# Altium PCB UU-PCBA-MANT-CON-AB.PcbDoc
Units mm, origin at the board's own origin, x right, y up, seen from the top; angles counter-clockwise.
Board outline 64 x 61 mm, 2 copper layers (Top Layer, Bottom Layer), stack 3.118 mm thick; 2 components, 3 nets, 13 pads, 0 vias.
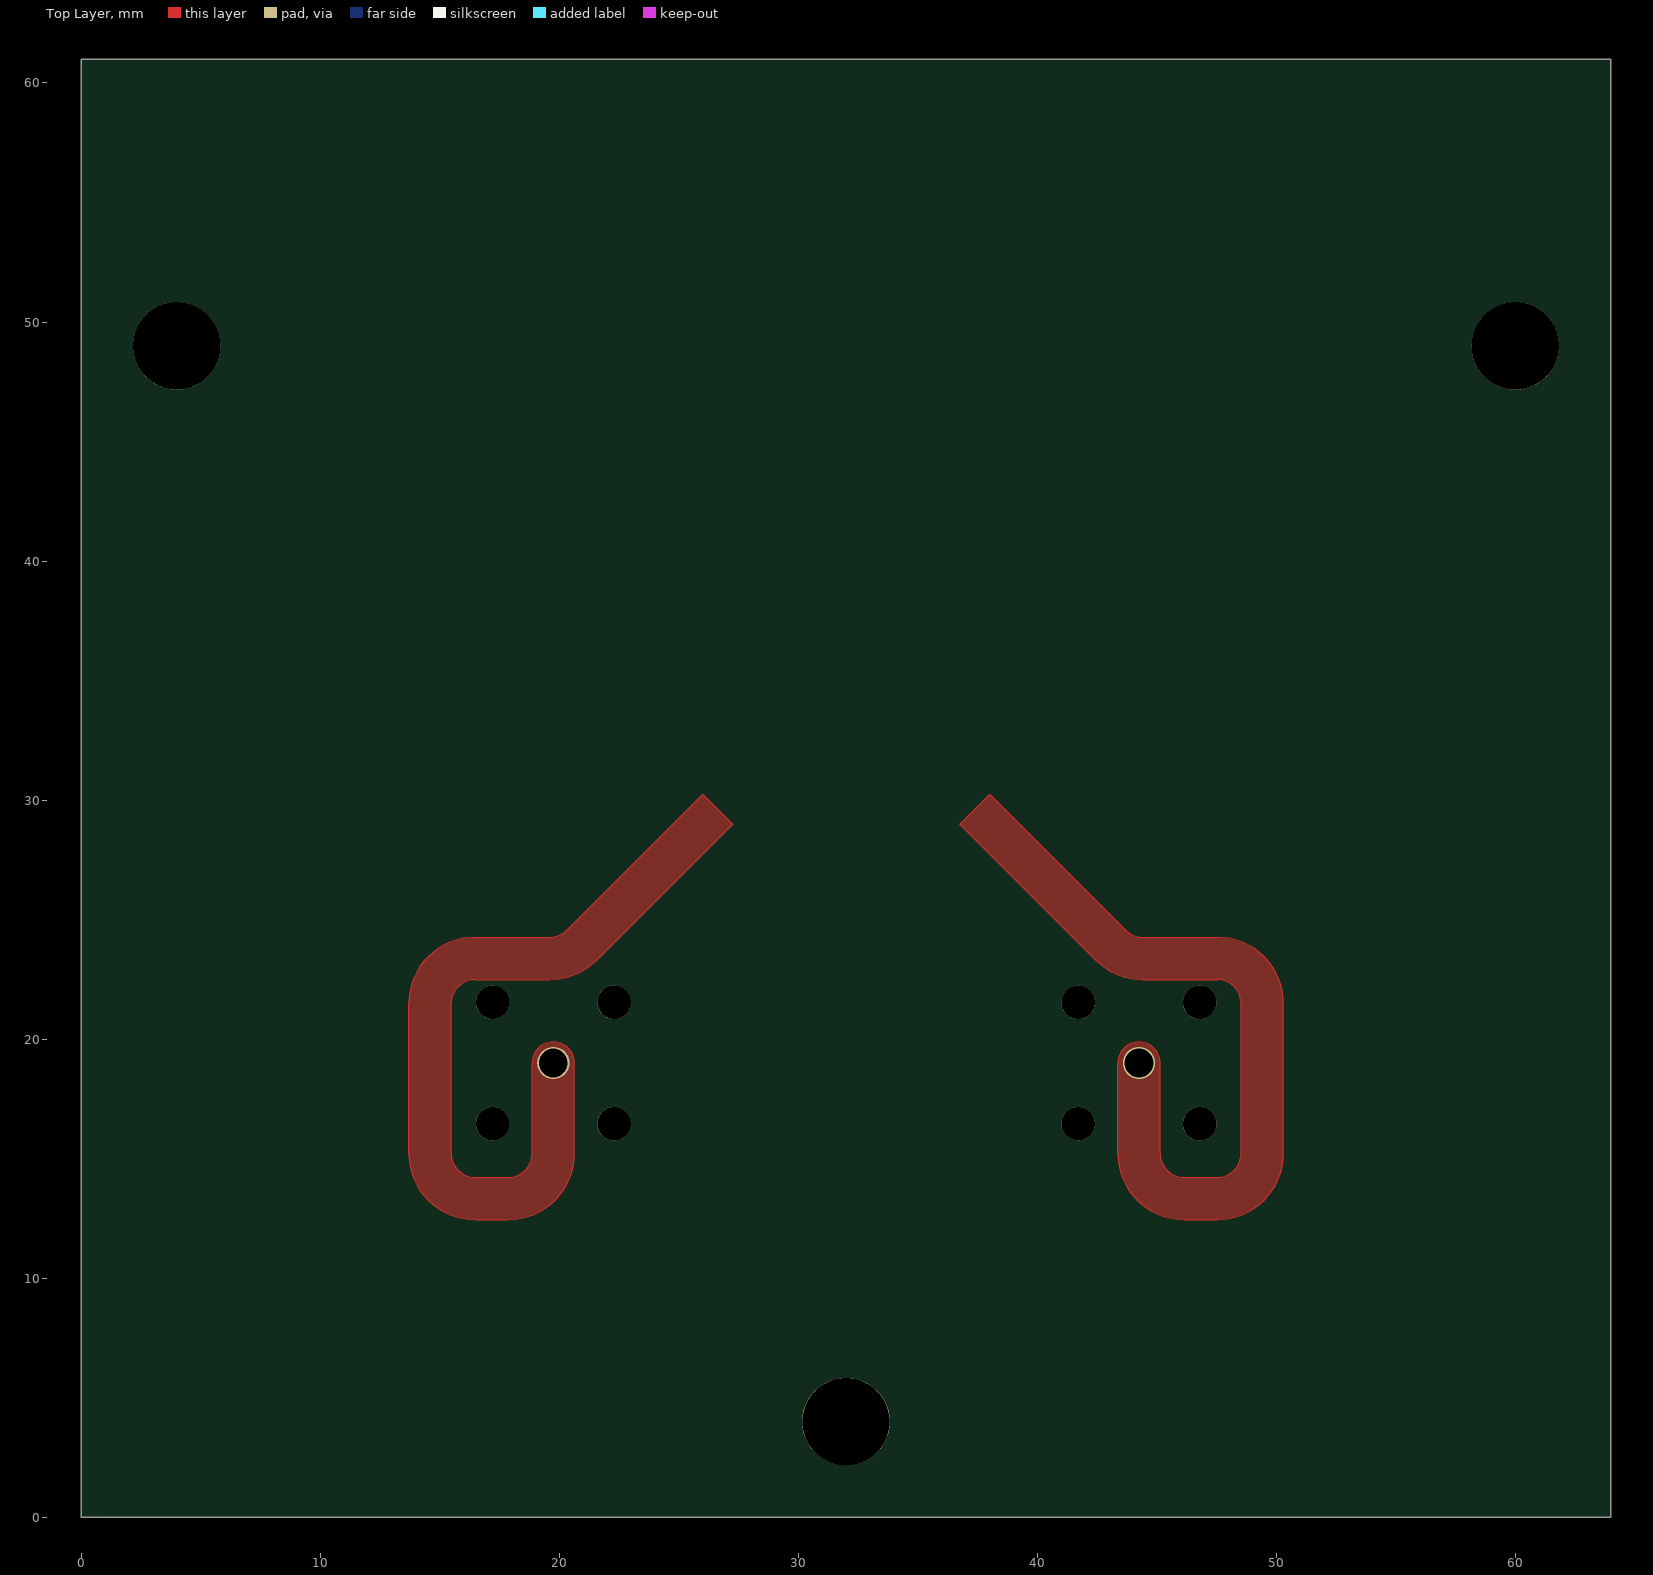
[diagram p0: Top Layer view]
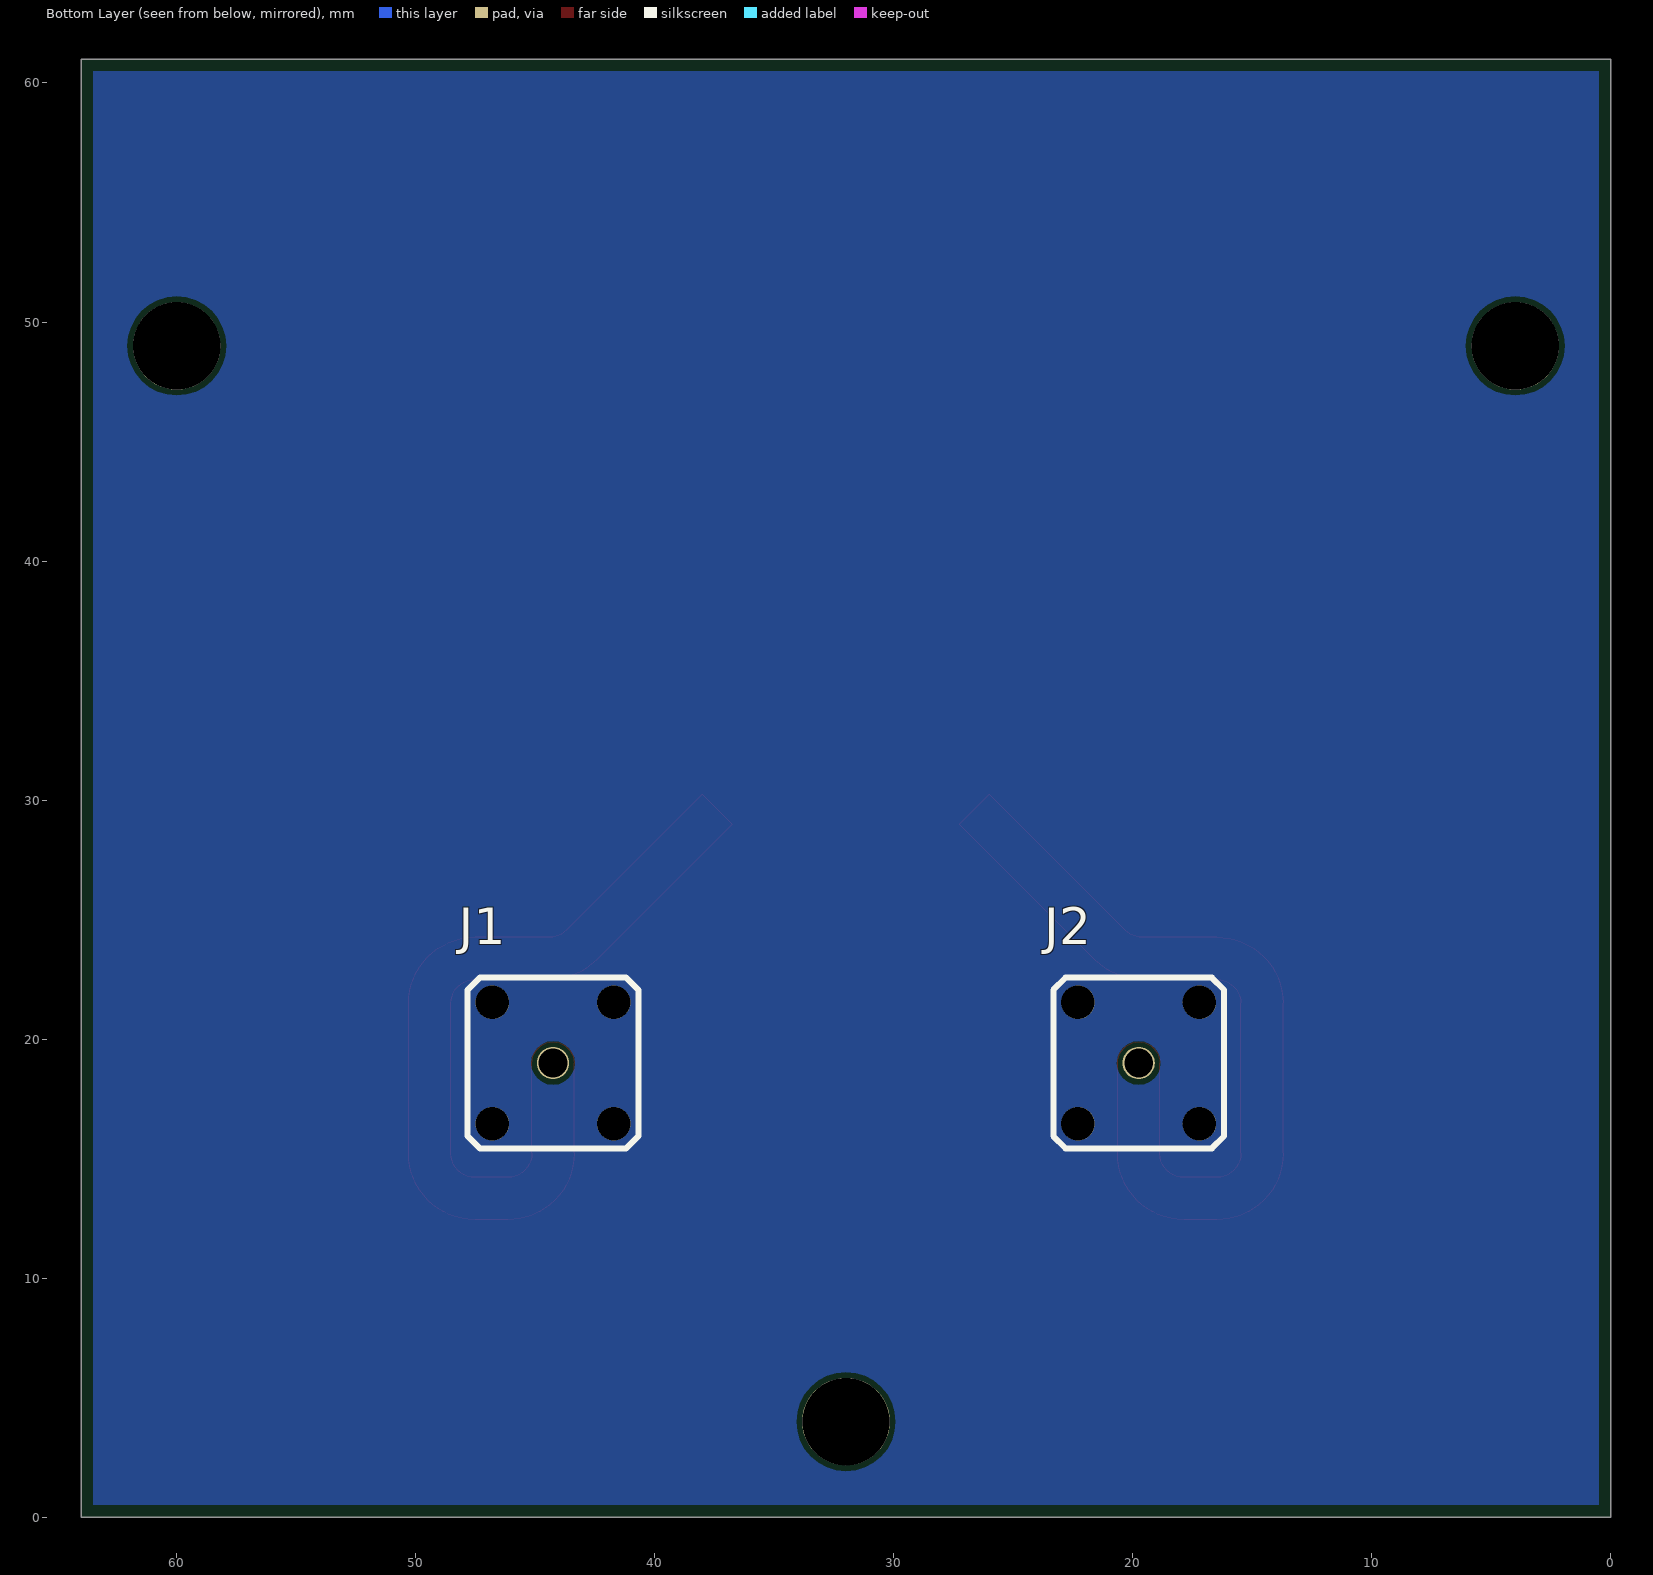
[diagram p1: Bottom Layer view, seen from below]

## Layer stack, top to bottom
Top Solder: solder mask 0.0254, Solder Resist, Dk 4
Top Layer: signal copper 0.035
Dielectric 1: core 3.048, Rogers AD300D, Dk 3
Bottom Layer: signal copper 0.035
Bottom Solder: solder mask 0.0254, Solder Resist, Dk 4

## Board outline
0,0 64,0 64,61 0,61

## Design rules (kind name [scope] priority, off if disabled: settings)
BoardOutlineClearance [All] p1: gap=0.508 ignorepadtopadclearanceinfootprint=FALSE
Clearance [All] p1: gap=0.254 ignorepadtopadclearanceinfootprint=FALSE except(0: Arc-Hole Track-Hole SMDPad-Hole THPad-Hole Via-Hole Fill-Hole Poly-Hole Region-Hole Text-Hole; 0.229: Track-THPad Track-Poly THPad-Poly)
ComponentClearance [All] p1: gap=0 collisioncheckmode=3 verticalgap=0 showdistances=FALSE
HoleSize [All] p1: absolutevalues=TRUE maxlimit=4 minlimit=0.025 maxpercent=80.000 minpercent=20.000
PlaneConnect [All] p1: planeconnectstyle=Direct reliefexpansion=0.508 reliefentries=4 reliefconductorwidth=0.254 reliefairgap=0.254
PolygonConnect [All] p1: connectstyle=Direct reliefconductorwidth=0.4 reliefentries=4 polygonreliefangle="45 Angle" airgapwidth=0.3
RoutingVias [All] p1: holewidth=0.711 width=1.27 viastyle="Through Hole" minholewidth=0.711 minwidth=1.27 maxholewidth=0.711 maxwidth=1.27
SolderMaskExpansion [All] p1: expansion=0.102 istentingtop=FALSE
Width [All] p1: maxlimit=30 minlimit=0.01 preferedwidth=1.1 minimp=50.000000 maximp=50.000000 favimp=50.000000
27 further rules are at their usual default settings.

## Components (designator, comment, footprint, x,y, rotation, side; value= is the part's Value field where it differs from the comment)
J1 "MCX Male" RSP-199156-01 44.256,19 r180 bottom
J2 "MCX Male" RSP-199156-01 19.756,19 r180 bottom

## Footprints (in the part's own frame and the unit in brackets; to place one, negate y for a bottom-side part, rotate by r counter-clockwise, add the part's x,y. Pads: shape width x height; smd on the part's side, far side on the other; paste and mask are expansions set on the pad)
RSP-199156-01 [mm] "Samtec MODIFIED 50 OHM MCX JACK PLUG, THROUGH-HOLE"
  round 1.4 hole 1.4 paste+0 mask-5: 0(-2.54,-2.54) 0(2.54,-2.54)
  round 1.4 hole 1.4 unplated paste+0 mask-5: 0(-2.54,2.54) 0(2.54,2.54)
  round 1.35 hole 1.2 paste+0 mask-5: 1(0,0)
  silkscreen extent -3.57,-3.57 3.57,3.57, body extent -3,-3 3,3, height 8.42

## Part data
J1 J2: library part RSP-199156-01, "Samtec MODIFIED 50 OHM MCX JACK PLUG, THROUGH-HOLE"

## Free pads (board coordinates)
  round 3.66 hole 3.66 unplated: 0(4,49) 0(32,4) 0(60,49)

## Nets (pads, with @x,y where several pads share a name; then routed paths per layer and width w, separated by ;. In a path a pad name is that pad's centre, name@x,y a point inside that pad or via, vN(x,y) a via of type N, cw(c..) or ccw(c..) an arc to the next point about the centre after c; other vN are vias at no path point)
ANT1: J1.1 | length 81.6
  Top Layer w0.013: J1.1@44.856,18.999 ccw(c44.256,18.999) J1.1@44.856,18.999 ; J1.1@44.856,18.999 ccw(c44.256,18.999) J1.1@44.856,18.999 ; 36.755,28.999 38.006,30.251 43.7,24.557 ccw(c44.407,25.264) 44.025,24.34 ccw(c44.407,25.264) 44.407,24.264 47.531,24.264 cw(c47.531,21.494) 49.49,23.453 cw(c47.531,21.494) 50.301,21.494 50.301,15.219 cw(c47.531,15.219) 49.49,13.26 cw(c47.531,15.219) 47.531,12.449 46.141,12.449 cw(c46.141,15.219) 44.183,13.26 cw(c46.141,15.219) 43.371,15.219 43.371,18.999 cw(c44.256,18.999) 44.256,19.884 cw(c44.256,18.999) 45.141,18.999 45.141,15.219 ccw(c46.141,15.219) 45.434,14.512 ccw(c46.141,15.219) 46.141,14.219 47.531,14.219 ccw(c47.531,15.219) 48.238,14.512 ccw(c47.531,15.219) 48.531,15.219 48.531,21.494 ccw(c47.531,21.494) 48.238,22.201 ccw(c47.531,21.494) 47.531,22.494 44.407,22.494 cw(c44.407,25.264) 43.347,22.705 cw(c44.407,25.264) 42.449,23.305 36.755,28.999 ; J1.1@44.822,18.999 ccw(c44.256,18.999) J1.1@44.822,18.999
ANT2: J2.1 | length 81.6
  Top Layer w0.013: J2.1@20.356,18.999 ccw(c19.756,18.999) J2.1@20.356,18.999 ; J2.1@20.356,18.999 ccw(c19.756,18.999) J2.1@20.356,18.999 ; 13.711,15.219 ccw(c16.481,15.219) 14.523,13.26 ccw(c16.481,15.219) 16.481,12.449 17.871,12.449 ccw(c17.871,15.219) 19.83,13.26 ccw(c17.871,15.219) 20.641,15.219 20.641,18.999 ccw(c19.756,18.999) 19.756,19.884 ccw(c19.756,18.999) 18.871,18.999 18.871,15.219 cw(c17.871,15.219) 18.578,14.512 cw(c17.871,15.219) 17.871,14.219 16.481,14.219 cw(c16.481,15.219) 15.774,14.512 cw(c16.481,15.219) 15.481,15.219 15.481,21.494 cw(c16.481,21.494) 15.774,22.201 cw(c16.481,21.494) 16.481,22.494 19.605,22.494 ccw(c19.605,25.264) 20.665,22.705 ccw(c19.605,25.264) 21.564,23.305 27.258,28.999 26.007,30.251 20.312,24.557 cw(c19.605,25.264) 19.988,24.34 cw(c19.605,25.264) 19.605,24.264 16.481,24.264 ccw(c16.481,21.494) 14.523,23.453 ccw(c16.481,21.494) 13.711,21.494 13.711,15.219 ; J2.1@20.322,18.999 ccw(c19.756,18.999) J2.1@20.322,18.999
GND: J1.0 J2.0

## Polygon pours and split planes (outlines as drawn)
GND on Bottom Layer "Bottom Layer-GND" (solid, pour order 0): 0,64 0,0 64,0 64,64
ANT1 on Top Layer "ANT1_L01_P022" (solid, pour order 22): 48.238,14.512 ccw(c47.531,15.219) 48.531,15.219 48.531,21.494 ccw(c47.531,21.494) 48.238,22.201 ccw(c47.531,21.494) 47.531,22.494 44.407,22.494 cw(c44.407,25.264) 43.347,22.705 cw(c44.407,25.264) 42.449,23.305 36.755,28.999 38.006,30.251 43.7,24.557 ccw(c44.407,25.264) 44.025,24.34 ccw(c44.407,25.264) 44.407,24.264 47.531,24.264 cw(c47.531,21.494) 49.49,23.453 cw(c47.531,21.494) 50.301,21.494 50.301,15.219 cw(c47.531,15.219) 49.49,13.26 cw(c47.531,15.219) 47.531,12.449 46.141,12.449 cw(c46.141,15.219) 44.183,13.26 cw(c46.141,15.219) 43.371,15.219 43.371,18.999 cw(c44.256,18.999) 44.256,19.884 cw(c44.256,18.999) 45.141,18.999 45.141,15.219 ccw(c46.141,15.219) 45.434,14.512 ccw(c46.141,15.219) 46.141,14.219 47.531,14.219 ccw(c47.531,15.219)
ANT2 on Top Layer "ANT2_L01_P021" (solid, pour order 21): 15.774,14.512 cw(c16.481,15.219) 15.481,15.219 15.481,21.494 cw(c16.481,21.494) 15.774,22.201 cw(c16.481,21.494) 16.481,22.494 19.605,22.494 ccw(c19.605,25.264) 20.665,22.705 ccw(c19.605,25.264) 21.564,23.305 27.258,28.999 26.007,30.251 20.312,24.557 cw(c19.605,25.264) 19.988,24.34 cw(c19.605,25.264) 19.605,24.264 16.481,24.264 ccw(c16.481,21.494) 14.523,23.453 ccw(c16.481,21.494) 13.711,21.494 13.711,15.219 ccw(c16.481,15.219) 14.523,13.26 ccw(c16.481,15.219) 16.481,12.449 17.871,12.449 ccw(c17.871,15.219) 19.83,13.26 ccw(c17.871,15.219) 20.641,15.219 20.641,18.999 ccw(c19.756,18.999) 19.756,19.884 ccw(c19.756,18.999) 18.871,18.999 18.871,15.219 cw(c17.871,15.219) 18.578,14.512 cw(c17.871,15.219) 17.871,14.219 16.481,14.219 cw(c16.481,15.219)
no net on Top Layer "Top Layer-No Net 4" (solid, pour order 12): 32,36
no net on Top Layer "Top Layer-No Net" (solid, pour order 6): 0,15.05
no net on Top Layer "Top Layer-No Net 1" (solid, pour order 4): 0,0
no net on Top Layer "Top Layer-No Net 2" (solid, pour order 2): 0,0
no net on Top Solder (solid): 0,61 64,61 64,0.006 63.994,0 0,0

## Silkscreen, mask and mechanical layers (free items; w line width, h text height)
Top Solder:
  circle w1: c44.253,19 r0.25
  circle w1: c19.759,19 r0.25
  rectangle: 0,0 64,0.693
  region: 0.699,0 0.699,61 0.006,61 0.006,0
  region: 63.997,0 63.997,61 63.304,61 63.304,0
  rectangle: 0,60.307 64,61
  pour cut-out: 45.896,16.46 ccw(c46.796,16.46) 46.796,15.56 ccw(c46.796,16.46) 47.696,16.46 ccw(c46.796,16.46) 46.796,17.36 ccw(c46.796,16.46)
  pour cut-out: 45.896,21.54 ccw(c46.796,21.54) 46.796,20.64 ccw(c46.796,21.54) 47.696,21.54 ccw(c46.796,21.54) 46.796,22.44 ccw(c46.796,21.54)
  pour cut-out: 16.316,21.54 ccw(c17.216,21.54) 17.216,20.64 ccw(c17.216,21.54) 18.116,21.54 ccw(c17.216,21.54) 17.216,22.44 ccw(c17.216,21.54)
  pour cut-out: 16.316,16.46 ccw(c17.216,16.46) 17.216,15.56 ccw(c17.216,16.46) 18.116,16.46 ccw(c17.216,16.46) 17.216,17.36 ccw(c17.216,16.46)
  pour cut-out: 40.816,21.54 ccw(c41.716,21.54) 41.716,20.64 ccw(c41.716,21.54) 42.616,21.54 ccw(c41.716,21.54) 41.716,22.44 ccw(c41.716,21.54)
  pour cut-out: 40.816,16.46 ccw(c41.716,16.46) 41.716,15.56 ccw(c41.716,16.46) 42.616,16.46 ccw(c41.716,16.46) 41.716,17.36 ccw(c41.716,16.46)
  pour cut-out: 21.396,21.54 ccw(c22.296,21.54) 22.296,20.64 ccw(c22.296,21.54) 23.196,21.54 ccw(c22.296,21.54) 22.296,22.44 ccw(c22.296,21.54)
  pour cut-out: 21.396,16.46 ccw(c22.296,16.46) 22.296,15.56 ccw(c22.296,16.46) 23.196,16.46 ccw(c22.296,16.46) 22.296,17.36 ccw(c22.296,16.46)
  pour cut-out: 46.053,19 cw(c44.253,19) 44.253,17.2 cw(c44.253,19) 42.453,19 cw(c44.253,19) 44.253,20.8 cw(c44.253,19)
  pour cut-out: 17.959,19 ccw(c19.759,19) 19.759,17.2 ccw(c19.759,19) 21.559,19 ccw(c19.759,19) 19.759,20.8 ccw(c19.759,19)
  pour cut-out: 19.726,19.001 ccw(c19.756,19.001) 19.756,18.971 ccw(c19.756,19.001) 19.786,19.001 ccw(c19.756,19.001) 19.756,19.031 ccw(c19.756,19.001)
  region: 0,61 64,61
Bottom Solder:
  circle w2.2: c17.216,21.54 r0.001
  circle w2.2: c22.296,21.54 r0.001
  circle w2.2: c46.796,21.54 r0.001
  circle w2.2: c41.716,21.54 r0.001
  circle w2.2: c46.795,16.46 r0.001
  circle w2.2: c41.715,16.46 r0.001
  circle w2.2: c17.215,16.46 r0.001
  circle w2.2: c22.295,16.46 r0.001
  circle w1.55: c44.256,18.999 r0.001
  circle w1.55: c19.756,19 r0.001
SIG-Outline:
  the board outline again, w0.127
old_patch:
  circle w0.013: c32,42.836 r15.4
  circle w0.013: c44.256,19.006 r0.45
  circle w0.013: c44.256,19.006 r0.485
  circle w0.013: c46.801,16.461 r0.665
  circle w0.013: c46.801,16.461 r0.7
  circle w0.013: c22.301,16.461 r0.665
  circle w0.013: c22.301,16.461 r0.7
  circle w0.013: c19.756,19.006 r0.45
  circle w0.013: c19.756,19.006 r0.485
  circle w0.013: c41.711,16.461 r0.665
  circle w0.013: c41.711,16.461 r0.7
  circle w0.013: c17.211,16.461 r0.665
  circle w0.013: c17.211,16.461 r0.7
  circle w0.013: c44.256,19.006 r0.485
  circle w0.013: c19.756,19.006 r0.485
  circle w0.013: c22.301,21.551 r0.7
  circle w0.013: c17.211,21.551 r0.7
  circle w0.013: c46.801,21.551 r0.7
  circle w0.013: c41.711,21.551 r0.7
  circle w0.013: c22.301,16.461 r0.7
  circle w0.013: c17.211,16.461 r0.7
  circle w0.013: c46.801,16.461 r0.7
  circle w0.013: c41.711,16.461 r0.7
  lines w0.013: 0.006,0.006 0.006,61 64.006,61 64.006,0.006 0.006,0.006 ; 17.495,41.234 ccw(c32.006,42.836) 18.739,36.741 ccw(c32.006,42.836) 21.337,32.87 21.995,33.484 cw(c32.006,42.836) 19.754,36.707 cw(c32.006,42.836) 18.519,40.434 19.208,40.557 ccw(c32.006,42.836) 22.814,33.644 ccw(c32.006,42.836) 29.727,30.038 29.604,29.349 cw(c32.006,42.836) 25.877,30.584 cw(c32.006,42.836) 22.654,32.825 22.04,32.167 ccw(c32.006,42.836) 25.911,29.569 ccw(c32.006,42.836) 30.404,28.325 30.679,30.809 cw(c32.006,42.836) 23.45,34.28 cw(c32.006,42.836) 19.979,41.509 17.495,41.234 ; 17.495,44.438 cw(c32.006,42.836) 18.739,48.931 cw(c32.006,42.836) 21.337,52.803 21.995,52.188 ccw(c32.006,42.836) 19.754,48.965 ccw(c32.006,42.836) 18.519,45.239 19.208,45.116 cw(c32.006,42.836) 22.814,52.029 cw(c32.006,42.836) 29.727,55.635 29.604,56.324 ccw(c32.006,42.836) 25.877,55.089 ccw(c32.006,42.836) 22.654,52.848 22.04,53.505 cw(c32.006,42.836) 25.911,56.103 cw(c32.006,42.836) 30.404,57.348 30.679,54.863 ccw(c32.006,42.836) 23.45,51.392 ccw(c32.006,42.836) 19.979,44.164 17.495,44.438 ; 33.334,30.809 ccw(c32.006,42.836) 40.562,34.28 ccw(c32.006,42.836) 44.033,41.509 46.518,41.234 cw(c32.006,42.836) 45.273,36.741 cw(c32.006,42.836) 42.675,32.87 42.018,33.484 ccw(c32.006,42.836) 44.259,36.707 ccw(c32.006,42.836) 45.494,40.434 44.805,40.557 cw(c32.006,42.836) 41.199,33.644 cw(c32.006,42.836) 34.286,30.038 34.409,29.349 ccw(c32.006,42.836) 38.135,30.584 ccw(c32.006,42.836) 41.358,32.825 41.973,32.167 cw(c32.006,42.836) 38.101,29.569 cw(c32.006,42.836) 33.608,28.325 33.334,30.809 ; 33.334,54.863 cw(c32.006,42.836) 40.562,51.392 cw(c32.006,42.836) 44.033,44.164 46.518,44.438 ccw(c32.006,42.836) 45.273,48.931 ccw(c32.006,42.836) 42.675,52.803 42.018,52.188 cw(c32.006,42.836) 44.259,48.965 cw(c32.006,42.836) 45.494,45.239 44.805,45.116 ccw(c32.006,42.836) 41.199,52.029 ccw(c32.006,42.836) 34.286,55.635 34.409,56.324 cw(c32.006,42.836) 38.135,55.089 cw(c32.006,42.836) 41.358,52.848 41.973,53.505 ccw(c32.006,42.836) 38.101,56.103 ccw(c32.006,42.836) 33.608,57.348 33.334,54.863
old_feed:
  circle w0.013: c19.756,19.006 r0.485
  circle w0.013: c44.256,19.006 r0.485
  circle w0.013: c44.256,19.006 r0.45
  circle w0.013: c19.756,19.006 r0.485
  circle w0.013: c19.756,19.006 r0.45
  circle w0.013: c46.801,16.461 r0.7
  circle w0.013: c46.801,16.461 r0.665
  circle w0.013: c41.711,16.461 r0.7
  circle w0.013: c41.711,16.461 r0.665
  circle w0.013: c22.301,16.461 r0.7
  circle w0.013: c22.301,16.461 r0.665
  circle w0.013: c17.211,16.461 r0.7
  circle w0.013: c17.211,16.461 r0.665
  circle w0.013: c44.256,19.006 r0.485
  circle w0.013: c19.756,19.006 r0.485
  circle w0.013: c22.301,21.551 r0.7
  circle w0.013: c17.211,21.551 r0.7
  circle w0.013: c46.801,21.551 r0.7
  circle w0.013: c41.711,21.551 r0.7
  circle w0.013: c22.301,16.461 r0.7
  circle w0.013: c17.211,16.461 r0.7
  circle w0.013: c46.801,16.461 r0.7
  circle w0.013: c41.711,16.461 r0.7
  circle w0.013: c44.256,19.006 r0.485
  lines w0.013: 0.006,0.006 0.006,61 64.006,61 64.006,0.006 0.006,0.006 ; 13.106,25.406 19.106,25.406 19.106,20.556 18.506,20.556 18.506,19.556 19.106,19.556 19.106,18.406 20.406,18.406 20.406,29.489 cw(c22.406,29.489) 20.559,30.254 cw(c22.406,29.489) 20.992,30.903 28.506,38.417 27.587,39.336 19.692,31.441 ccw(c21.106,30.027) 19.259,30.793 ccw(c21.106,30.027) 19.106,30.027 19.106,26.506 13.106,26.506 13.106,25.406 ; 35.507,38.417 43.021,30.903 cw(c41.606,29.489) 43.454,30.254 cw(c41.606,29.489) 43.606,29.489 43.606,18.406 44.906,18.406 44.906,19.556 45.506,19.556 45.506,20.556 44.906,20.556 44.906,25.406 50.906,25.406 50.906,26.506 44.906,26.506 44.906,30.027 ccw(c42.906,30.027) 44.754,30.793 ccw(c42.906,30.027) 44.321,31.441 36.426,39.336 35.507,38.417
2020-2-24_patch:
  circle w0.013: c32.006,35.006 r15.6
  lines w0.013: 17.436,32.712 ccw(c32.006,35.006) 18.718,28.604 ccw(c32.006,35.006) 21.132,25.041 21.795,25.649 cw(c32.006,35.006) 19.789,28.483 cw(c32.006,35.006) 18.55,31.726 19.765,32.022 ccw(c32.006,35.006) 23.097,26.097 ccw(c32.006,35.006) 29.022,22.765 28.726,21.55 cw(c32.006,35.006) 25.483,22.789 cw(c32.006,35.006) 22.649,24.795 22.041,24.132 ccw(c32.006,35.006) 25.604,21.718 ccw(c32.006,35.006) 29.712,20.436 30.186,23.449 cw(c32.006,35.006) 23.733,26.733 cw(c32.006,35.006) 20.449,33.186 17.436,32.712 ; 17.436,37.301 cw(c32.006,35.006) 18.718,41.409 cw(c32.006,35.006) 21.132,44.971 21.795,44.363 ccw(c32.006,35.006) 19.789,41.53 ccw(c32.006,35.006) 18.55,38.287 19.765,37.991 cw(c32.006,35.006) 23.097,43.916 cw(c32.006,35.006) 29.022,47.248 28.726,48.462 ccw(c32.006,35.006) 25.483,47.224 ccw(c32.006,35.006) 22.649,45.218 22.041,45.881 cw(c32.006,35.006) 25.604,48.294 cw(c32.006,35.006) 29.712,49.577 30.186,46.564 ccw(c32.006,35.006) 23.733,43.279 ccw(c32.006,35.006) 20.449,36.827 17.436,37.301 ; 33.827,23.449 ccw(c32.006,35.006) 40.279,26.733 ccw(c32.006,35.006) 43.564,33.186 46.577,32.712 cw(c32.006,35.006) 45.294,28.604 cw(c32.006,35.006) 42.881,25.041 42.218,25.649 ccw(c32.006,35.006) 44.224,28.483 ccw(c32.006,35.006) 45.462,31.726 44.248,32.022 cw(c32.006,35.006) 40.916,26.097 cw(c32.006,35.006) 34.991,22.765 35.287,21.55 ccw(c32.006,35.006) 38.53,22.789 ccw(c32.006,35.006) 41.363,24.795 41.971,24.132 cw(c32.006,35.006) 38.409,21.718 cw(c32.006,35.006) 34.301,20.436 33.827,23.449 ; 33.827,46.564 cw(c32.006,35.006) 40.279,43.28 cw(c32.006,35.006) 43.564,36.827 46.577,37.301 ccw(c32.006,35.006) 45.294,41.409 ccw(c32.006,35.006) 42.881,44.971 42.218,44.363 cw(c32.006,35.006) 44.224,41.53 cw(c32.006,35.006) 45.462,38.287 44.248,37.991 ccw(c32.006,35.006) 40.916,43.916 ccw(c32.006,35.006) 34.991,47.248 35.287,48.462 cw(c32.006,35.006) 38.53,47.224 cw(c32.006,35.006) 41.363,45.218 41.971,45.881 ccw(c32.006,35.006) 38.409,48.294 ccw(c32.006,35.006) 34.301,49.577 33.827,46.564
2020-2-24_feed:
  circle w0.013: c44.25,19 r0.45
  circle w0.013: c44.25,19 r0.485
  circle w0.013: c19.75,19 r0.45
  circle w0.013: c19.75,19 r0.485
  lines w0.013: 12.25,10.6 ccw(c14.25,10.6) 12.836,9.186 ccw(c14.25,10.6) 14.25,8.6 18.75,8.6 ccw(c18.75,10.6) 20.164,9.186 ccw(c18.75,10.6) 20.75,10.6 20.75,20 18.75,20 18.75,12.6 cw(c16.75,12.6) 18.164,11.186 cw(c16.75,12.6) 16.75,10.6 16.25,10.6 cw(c16.25,12.6) 14.836,11.186 cw(c16.25,12.6) 14.25,12.6 14.25,21.403 cw(c16.25,21.403) 14.836,22.818 cw(c16.25,21.403) 16.25,23.403 20.989,23.403 ccw(c20.989,25.403) 21.755,23.556 ccw(c20.989,25.403) 22.403,23.989 26.131,27.717 24.717,29.131 21.575,25.989 cw(c20.161,27.403) 20.926,25.556 cw(c20.161,27.403) 20.161,25.403 14.25,25.403 ccw(c14.25,23.403) 12.836,24.818 ccw(c14.25,23.403) 12.25,23.403 12.25,10.6 ; 37.869,27.717 39.283,29.131 42.425,25.989 ccw(c43.839,27.403) 43.074,25.556 ccw(c43.839,27.403) 43.839,25.403 49.75,25.403 cw(c49.75,23.403) 51.164,24.818 cw(c49.75,23.403) 51.75,23.403 51.75,10.6 cw(c49.75,10.6) 51.164,9.186 cw(c49.75,10.6) 49.75,8.6 45.25,8.6 cw(c45.25,10.6) 43.836,9.186 cw(c45.25,10.6) 43.25,10.6 43.25,20 45.25,20 45.25,12.6 ccw(c47.25,12.6) 45.836,11.186 ccw(c47.25,12.6) 47.25,10.6 47.75,10.6 ccw(c47.75,12.6) 49.164,11.186 ccw(c47.75,12.6) 49.75,12.6 49.75,21.403 ccw(c47.75,21.403) 49.164,22.818 ccw(c47.75,21.403) 47.75,23.403 43.011,23.403 cw(c43.011,25.403) 42.245,23.556 cw(c43.011,25.403) 41.597,23.989 37.869,27.717
2020-2-24_gnd:
  circle w0.013: c44.25,19 r1
  circle w0.013: c19.75,19 r1
  circle w0.013: c46.795,21.545 r0.7
  circle w0.013: c41.705,21.545 r0.7
  circle w0.013: c46.795,16.455 r0.7
  circle w0.013: c41.705,16.455 r0.7
  circle w0.013: c17.205,21.545 r0.7
  circle w0.013: c22.295,21.545 r0.7
  circle w0.013: c17.205,16.455 r0.7
  circle w0.013: c22.295,16.455 r0.7
  circle w0.013: c44.25,19 r0.45
  circle w0.013: c44.25,19 r0.485
  circle w0.013: c19.75,19 r0.45
  circle w0.013: c19.75,19 r0.485
  circle w0.013: c46.795,16.455 r0.665
  circle w0.013: c46.795,16.455 r0.7
  circle w0.013: c41.705,16.455 r0.665
  circle w0.013: c41.705,16.455 r0.7
  circle w0.013: c17.205,16.455 r0.665
  circle w0.013: c17.205,16.455 r0.7
  circle w0.013: c22.295,16.455 r0.665
  circle w0.013: c22.295,16.455 r0.7
  lines w0.013: 0.508,0.508 63.492,0.508 63.492,60.492 0.508,60.492 0.508,0.508
2020-09-02_feed:
  circle w0.013: c19.75,20 r0.6
  circle w0.013: c19.75,20 r0.565
  circle w0.013: c44.25,20 r0.6
  circle w0.013: c44.25,20 r0.565
  circle w0.013: c19.75,20 r0.6
  circle w0.013: c44.25,20 r0.6
  lines w0.013: 13.705,16.22 ccw(c16.475,16.22) 14.516,14.261 ccw(c16.475,16.22) 16.475,13.45 17.865,13.45 ccw(c17.865,16.22) 19.824,14.261 ccw(c17.865,16.22) 20.635,16.22 20.635,20 ccw(c19.75,20) 19.75,20.885 ccw(c19.75,20) 18.865,20 18.865,16.22 cw(c17.865,16.22) 18.572,15.513 cw(c17.865,16.22) 17.865,15.22 16.475,15.22 cw(c16.475,16.22) 15.768,15.513 cw(c16.475,16.22) 15.475,16.22 15.475,22.495 cw(c16.475,22.495) 15.768,23.202 cw(c16.475,22.495) 16.475,23.495 19.599,23.495 ccw(c19.599,26.265) 20.659,23.706 ccw(c19.599,26.265) 21.558,24.306 27.252,30 26,31.252 20.306,25.558 cw(c19.599,26.265) 19.982,25.341 cw(c19.599,26.265) 19.599,25.265 16.475,25.265 ccw(c16.475,22.495) 14.516,24.454 ccw(c16.475,22.495) 13.705,22.495 13.705,16.22 ; 36.748,30 42.442,24.306 ccw(c44.401,26.265) 43.341,23.706 ccw(c44.401,26.265) 44.401,23.495 47.525,23.495 cw(c47.525,22.495) 48.232,23.202 cw(c47.525,22.495) 48.525,22.495 48.525,16.22 cw(c47.525,16.22) 48.232,15.513 cw(c47.525,16.22) 47.525,15.22 46.135,15.22 cw(c46.135,16.22) 45.428,15.513 cw(c46.135,16.22) 45.135,16.22 45.135,20 ccw(c44.25,20) 44.25,20.885 ccw(c44.25,20) 43.365,20 43.365,16.22 ccw(c46.135,16.22) 44.176,14.261 ccw(c46.135,16.22) 46.135,13.45 47.525,13.45 ccw(c47.525,16.22) 49.484,14.261 ccw(c47.525,16.22) 50.295,16.22 50.295,22.495 ccw(c47.525,22.495) 49.484,24.454 ccw(c47.525,22.495) 47.525,25.265 44.401,25.265 cw(c44.401,26.265) 44.018,25.341 cw(c44.401,26.265) 43.694,25.558 38,31.252 36.748,30